# Altium PCB RGB_SL.PcbDoc (part 2 of 2)
Units mm, origin at the board's own origin, x right, y up, seen from the top; angles counter-clockwise.
Board outline 50 x 50 mm, 2 copper layers (Top Layer, Bottom Layer); 48 components, 35 nets, 139 pads, 27 vias.
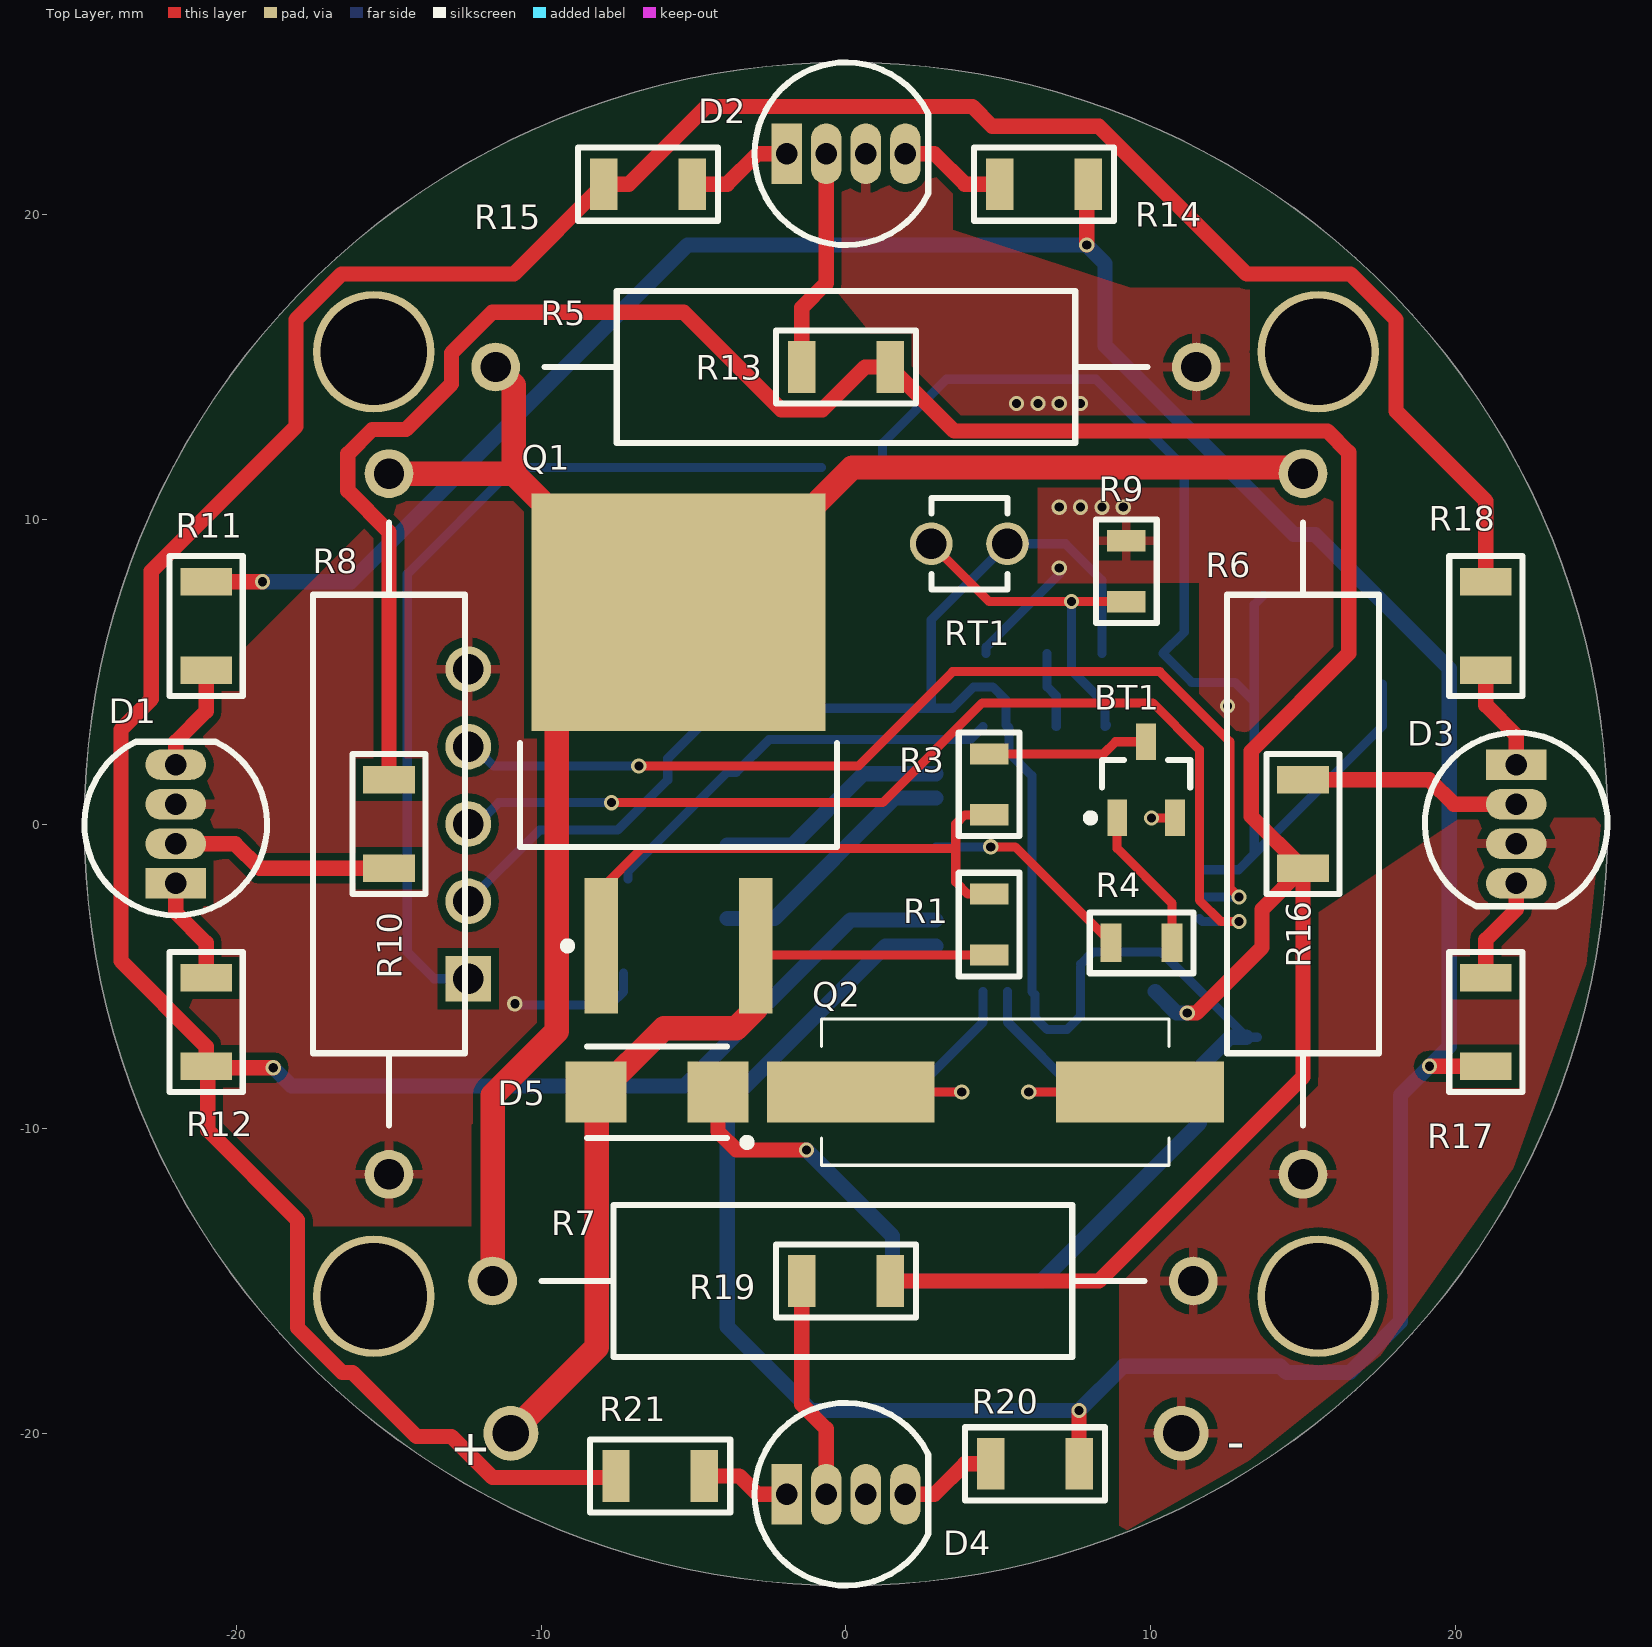
[diagram p0: Top Layer view]

## Silkscreen, mask and mechanical layers (free items; w line width, h text height) (continued)
Board Outline: (continued)
  circle w0.15: c0,0 r25
Comments Top:
  text "RGB_LS ВИД СВЕРХУ" at -6.2,26.7 h2
  text "*ВЫДЕЛЕННЫЕ ЭЛЕМЕНТЫ НЕ МОНТИРУЮТСЯ" at -24,-29.7 h2
Mechanical 17:
  text "RGB_LS ВИД СНИЗУ" at 8.2,26.7 h2